# Altium PCB TEST_PLATFORM.PcbDoc
Units mil, origin at the board's own origin, x right, y up, seen from the top; angles counter-clockwise.
Board outline 6000 x 4000 mil, 2 copper layers (Top Layer, Bottom Layer); 8 components, 16 nets, 94 pads, 0 vias.
Unrouted connection lines stored in the file: 8.
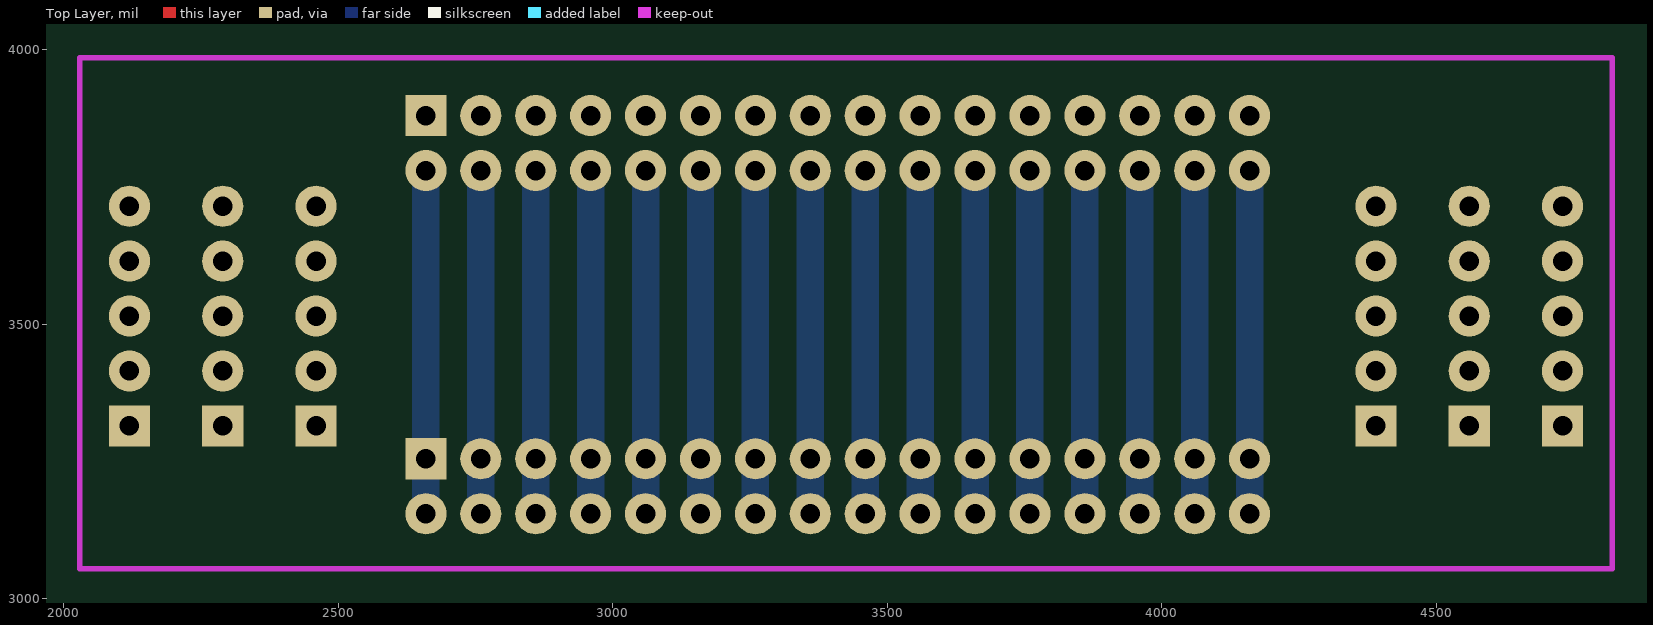
[diagram p0: Top Layer view]
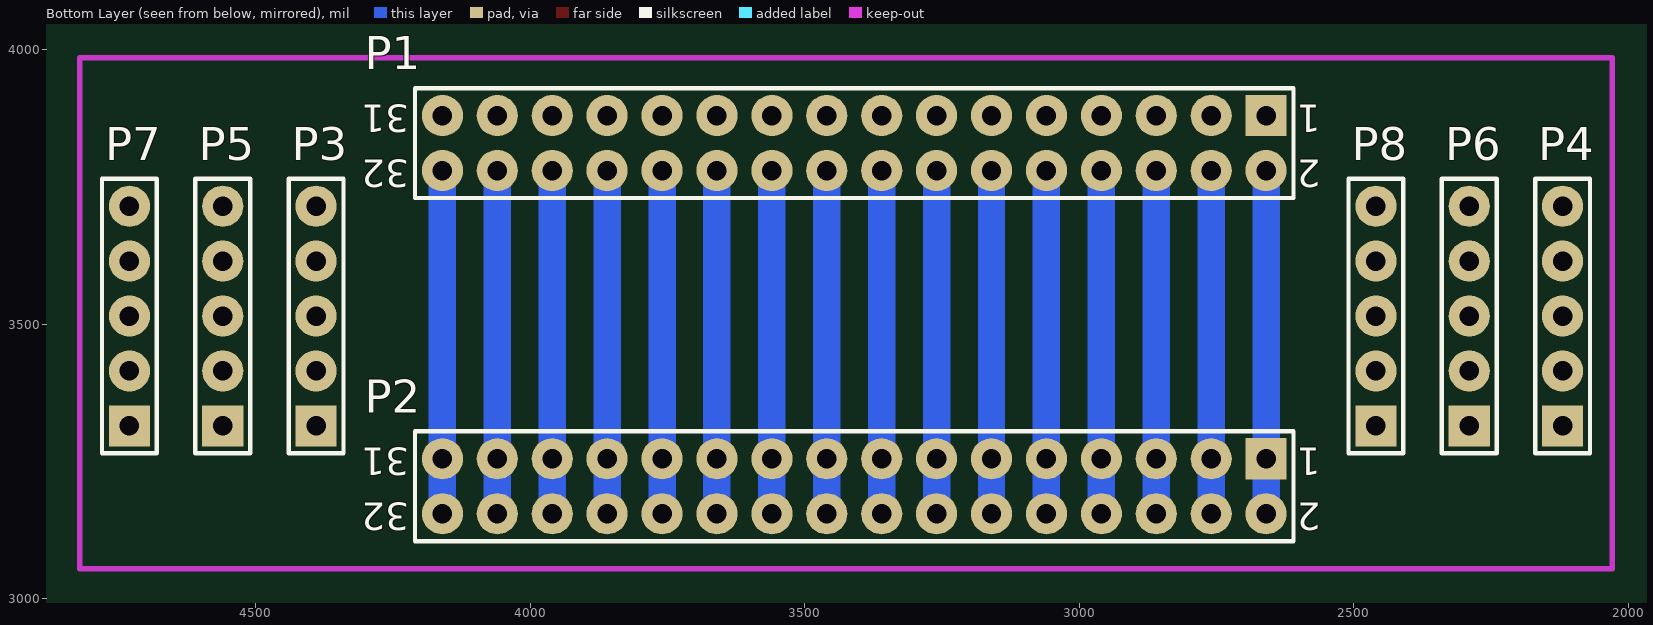
[diagram p1: Bottom Layer view, seen from below]

## Layer stack, top to bottom
Top Solder: solder mask 0.4, Solder Resist, Dk 3.5
Top Layer: signal copper 1.4
Dielectric 1: dielectric 12.6, FR-4, Dk 4.8
Bottom Layer: signal copper 1.4
Bottom Solder: solder mask 0.4, Solder Resist, Dk 3.5

## Board outline
1000,1000 7000,1000 7000,5000 1000,5000

## Design rules (kind name [scope] priority, off if disabled: settings)
Clearance [All] p1: gap=10 ignorepadtopadclearanceinfootprint=FALSE except(0: Arc-Hole Track-Hole SMDPad-Hole THPad-Hole Via-Hole Fill-Hole Poly-Hole Region-Hole Text-Hole)
PolygonConnect [All] p1: connectstyle=Relief reliefconductorwidth=10 reliefentries=4 polygonreliefangle="90 Angle" airgapwidth=10
RoomDefinition TEST_PLATFORM [InComponentClass('TEST_PLATFORM')] p1: confinementstyle=ConfineIn formatcopy=TRUE lockcomponents=FALSE outline 2030,3055 2030,3985 4820,3985 4820,3055
RoutingVias [All] p1: holewidth=28 width=50 viastyle="Through Hole" minholewidth=28 minwidth=50 maxholewidth=28 maxwidth=50
SolderMaskExpansion [All] p1: expansion=4
Width [All] p1: maxlimit=50 minlimit=10 preferedwidth=50 bottomlayer_maxwidth=10 bottomlayer_prefwidth=10 minimp=50.000000 maximp=50.000000 favimp=50.000000
30 further rules are at their usual default settings.

## Components (designator, comment, footprint, x,y, rotation, side; value= is the part's Value field where it differs from the comment)
P1 "Header 16X2" HDR2X16 2660,3880 r0 bottom
P2 "Header 16X2" HDR2X16 2660,3255 r0 bottom
P3 "Header 5" HDR1X5 4390,3315 r90 bottom
P4 "Header 5" HDR1X5 2120,3315 r90 bottom
P5 "Header 5" HDR1X5 4560,3315 r90 bottom
P6 "Header 5" HDR1X5 2290,3315 r90 bottom
P7 "Header 5" HDR1X5 4730,3315 r90 bottom
P8 "Header 5" HDR1X5 2460,3315 r90 bottom

## Footprints (in the part's own frame and the unit in brackets; to place one, negate y for a bottom-side part, rotate by r counter-clockwise, add the part's x,y. Pads: shape width x height; smd on the part's side, far side on the other; paste and mask are expansions set on the pad)
HDR1X5 [mm] "Connector; Header; 5 Position"
  rect 1.905x1.905 hole 0.9: 1(0,0)
  round 1.905 hole 0.9: 2(2.54,0) 3(5.08,0) 4(7.62,0) 5(10.16,0)
  silkscreen extent -1.27,-1.27 11.43,1.27
HDR2X16 [mm] "Connector; Header; 16x2 Position"
  rect 1.905x1.905 hole 0.9: 1(0,0)
  round 1.905 hole 0.9: 2(0,2.54) 3(2.54,0) 4(2.54,2.54) 5(5.08,0) 6(5.08,2.54) 7(7.62,0) 8(7.62,2.54) 9(10.16,0) 10(10.16,2.54) 11(12.7,0) 12(12.7,2.54) 13(15.24,0) 14(15.24,2.54) 15(17.78,0) 16(17.78,2.54) 17(20.32,0) 18(20.32,2.54) 19(22.86,0) 20(22.86,2.54) 21(25.4,0) 22(25.4,2.54) 23(27.94,0) 24(27.94,2.54) 25(30.48,0) 26(30.48,2.54) 27(33.02,0) 28(33.02,2.54) 29(35.56,0) 30(35.56,2.54) 31(38.1,0) 32(38.1,2.54)
  silkscreen extent -1.27,-1.27 39.37,3.81

## Part data
P1 P2: "Header, 16-Pin, Dual row", LatestRevisionDate=17-Jul-2002, LatestRevisionNote="Re-released for DXP Platform.", Publisher="Altium Limited"
P3 P4 P5 P6 P7 P8: "Header, 5-Pin", LatestRevisionDate=17-Jul-2002, LatestRevisionNote="Re-released for DXP Platform.", Publisher="Altium Limited"

## Nets (pads, with @x,y where several pads share a name; then routed paths per layer and width w, separated by ;. In a path a pad name is that pad's centre, name@x,y a point inside that pad or via, vN(x,y) a via of type N, cw(c..) or ccw(c..) an arc to the next point about the centre after c; other vN are vias at no path point)
NetP1_2: P1.2 P1.17 P2.1 P2.2 | length 625
  Bottom Layer w50: P2.2 P2.1 P1.2
NetP1_4: P1.4 P2.3 P2.4 | length 625
  Bottom Layer w50: P2.4 P2.3 P1.4
NetP1_6: P1.6 P1.19 P2.5 P2.6 | length 625
  Bottom Layer w50: P2.6 P2.5 P1.6
NetP1_8: P1.8 P2.7 P2.8 | length 625
  Bottom Layer w50: P2.8 P2.7 P1.8
NetP1_10: P1.10 P1.21 P2.9 P2.10 | length 625
  Bottom Layer w50: P2.10 P2.9 P1.10
NetP1_12: P1.12 P2.11 P2.12 | length 625
  Bottom Layer w50: P2.12 P2.11 P1.12
NetP1_14: P1.14 P1.23 P2.13 P2.14 | length 625
  Bottom Layer w50: P2.14 P2.13 P1.14
NetP1_16: P1.16 P2.15 P2.16 | length 625
  Bottom Layer w50: P2.16 P2.15 P1.16
NetP1_18: P1.18 P1.25 P2.17 P2.18 | length 625
  Bottom Layer w50: P2.18 P2.17 P1.18
NetP1_20: P1.20 P2.19 P2.20 | length 625
  Bottom Layer w50: P2.20 P2.19 P1.20
NetP1_22: P1.22 P1.27 P2.21 P2.22 | length 625
  Bottom Layer w50: P2.22 P2.21 P1.22
NetP1_24: P1.24 P2.23 P2.24 | length 625
  Bottom Layer w50: P2.24 P2.23 P1.24
NetP1_26: P1.26 P1.29 P2.25 P2.26 | length 625
  Bottom Layer w50: P2.26 P2.25 P1.26
NetP1_28: P1.28 P2.27 P2.28 | length 625
  Bottom Layer w50: P2.28 P2.27 P1.28
NetP1_30: P1.30 P1.31 P2.29 P2.30 | length 625
  Bottom Layer w50: P2.30 P2.29 P1.30
NetP1_32: P1.32 P2.31 P2.32 | length 625
  Bottom Layer w50: P2.32 P2.31 P1.32
pads on no net: P1.1 P1.3 P1.5 P1.7 P1.9 P1.11 P1.13 P1.15 P3.1 P3.2 P3.3 P3.4 P3.5 P4.1 P4.2 P4.3 P4.4 P4.5 P5.1 P5.2 P5.3 P5.4 P5.5 P6.1 P6.2 P6.3 P6.4 P6.5 P7.1 P7.2 P7.3 P7.4 P7.5 P8.1 P8.2 P8.3 P8.4 P8.5

## Keep-outs
Keep-Out Layer:
  lines w10: 2030,3055 2030,3985 4820,3985 4820,3055 2030,3055

## Text inside footprints (layer, text, board x,y; h text height)
P1: Bottom Overlay "32" at 4220,3800 h50 r180; Bottom Overlay "31" at 4220,3900 h50 r180; Bottom Overlay "1" at 2560,3900 h50 r180; Bottom Overlay "2" at 2560,3800 h50 r180
P2: Bottom Overlay "32" at 4220,3175 h50 r180; Bottom Overlay "31" at 4220,3275 h50 r180; Bottom Overlay "1" at 2560,3275 h50 r180; Bottom Overlay "2" at 2560,3175 h50 r180